# Altium PCB Breakout_v4.PcbDoc
Units mm, origin at the board's own origin, x right, y up, seen from the top; angles counter-clockwise.
Board outline 222 x 70 mm, 2 copper layers (Top Layer, Bottom Layer); 42 components, 39 nets, 139 pads, 4 vias.
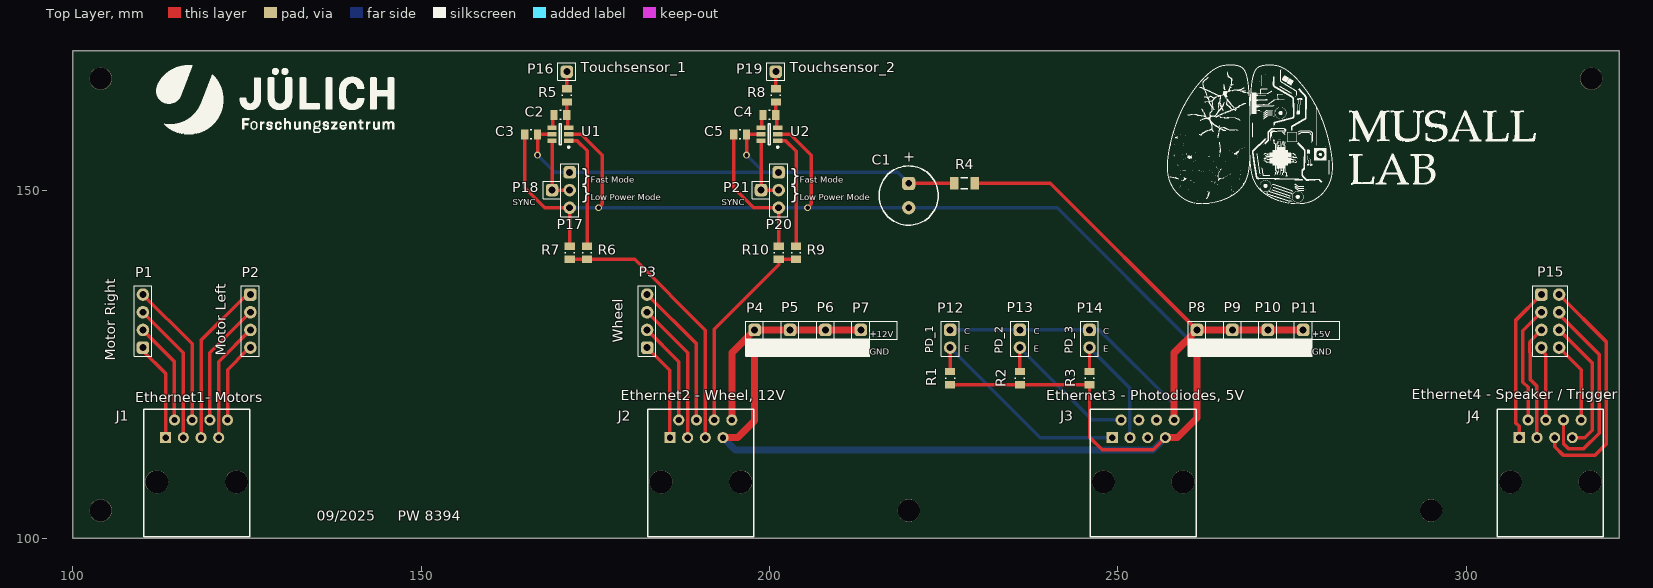
[diagram p0: Top Layer view]
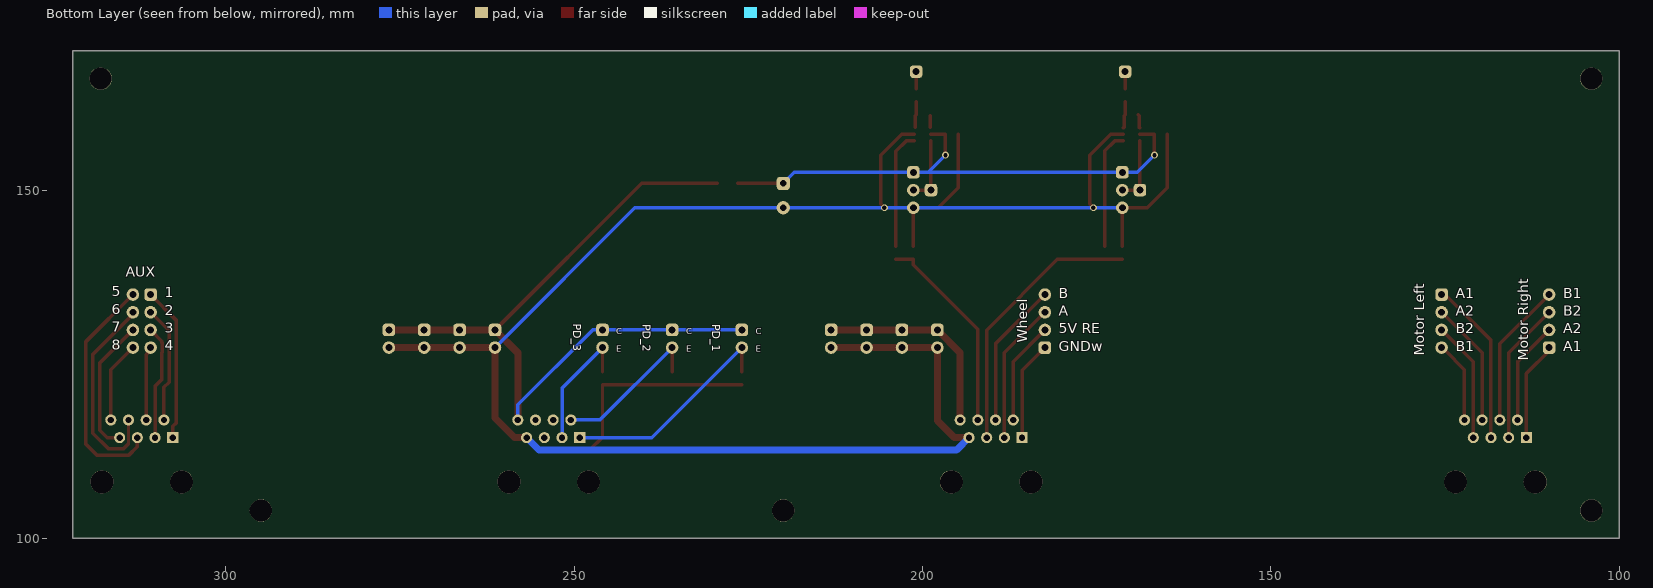
[diagram p1: Bottom Layer view, seen from below]
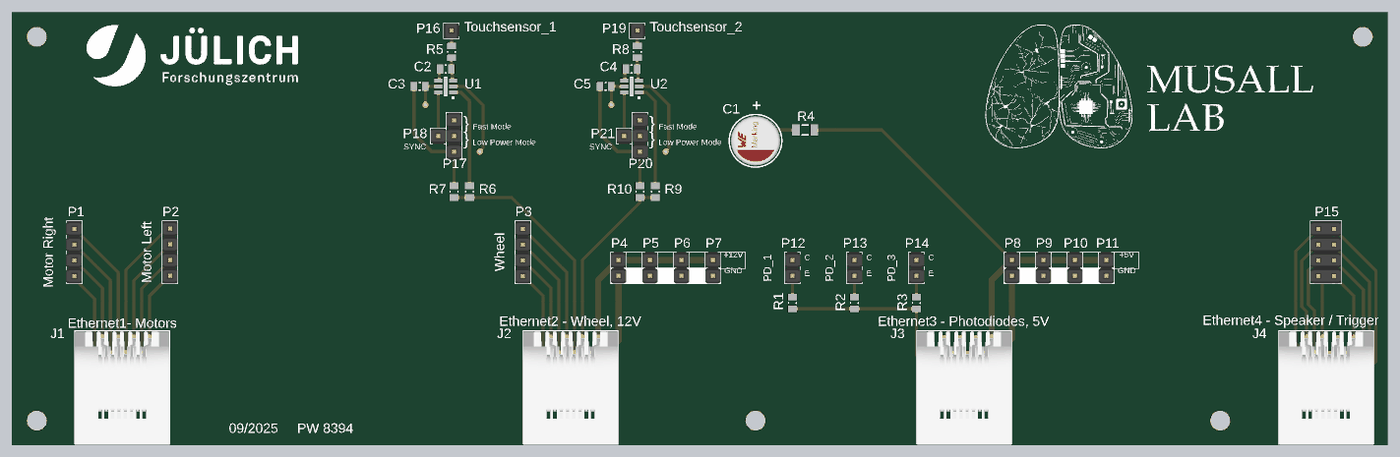
[diagram p2: 3D render of the assembled board from above, using the file's embedded part models]

## Layer stack, top to bottom
Top Solder: solder mask 0.0102, Solder Resist, Dk 3.5
Top Layer: signal copper 0.0356
Dielectric 1: dielectric 0.32, FR-4, Dk 4.8
Bottom Layer: signal copper 0.0356
Bottom Solder: solder mask 0.0102, Solder Resist, Dk 3.5

## Board outline
100,100 100,170 322,170 322,100

## Design rules (kind name [scope] priority, off if disabled: settings)
Clearance [All] p1: gap=0.2 ignorepadtopadclearanceinfootprint=FALSE
ComponentClearance [All] p1: gap=0.01 collisioncheckmode=3 verticalgap=0.01 showdistances=FALSE
DiffPairsRouting [All] p1: maxlimit=5 minlimit=0.3 mostfreqgap=0.5 toplayer_minwidth=0.2 toplayer_maxwidth=5 toplayer_prefwidth=0.5 bottomlayer_minwidth=0.2 bottomlayer_maxwidth=5 bottomlayer_prefwidth=0.5 maxuncoupledlength=12.7
HoleToHoleClearance [All] p1: gap=0.2 allowstackedmicrovias=TRUE
MinimumSolderMaskSliver [All] p1: minsoldermaskwidth=0.2
PolygonConnect [All] p1: connectstyle=Relief reliefconductorwidth=0.254 reliefentries=4 polygonreliefangle="90 Angle" airgapwidth=0.254
RoutingVias [All] p1: holewidth=0.711 width=1.27 viastyle="Through Hole" minholewidth=0.711 minwidth=1.27 maxholewidth=0.711 maxwidth=1.27
SilkToSilkClearance [All] p1: silktosilkclearance=0
SilkToSolderMaskClearance [IsPad] p1: minsilkscreentomaskgap=0 clearancetoexposedcopper=TRUE
SolderMaskExpansion [All] p1: expansion=0.102 istentingtop=FALSE
SupplyNets "Schematic Supply Nets_2" [InNet('+12')] p1: voltage=0.000
SupplyNets "Schematic Supply Nets_1" [InNet('GND')] p2: voltage=0.000
SupplyNets "Schematic Supply Nets" [InNet('+5V')] p3: voltage=0.000
Width [All] p1: maxlimit=5 minlimit=0.2 preferedwidth=0.5
24 further rules are at their usual default settings.

## Components (designator, comment, footprint, x,y, rotation, side; value= is the part's Value field where it differs from the comment)
C1 "870585774003" WCAP-HTAH_D8H11.5 220,149.21 r90 top locked value=47µF
C2 "10nF 0805 X7R 50V 5%" "Copy of 0805" 170,160.8 r0 top locked value=10nF
C3 "100nF 0805 X7R 100V" 0805 165.8,158 r180 top locked value=100nF
C4 "10nF 0805 X7R 50V 5%" "Copy of 0805" 200,160.8 r0 top locked value=10nF
C5 "100nF 0805 X7R 100V" 0805 195.8,158 r180 top locked value=100nF
J1 "5569118-1" 5569118-1-Footprint-1 112.065,108.11 r0 top locked
J2 "5569118-1" 5569118-1-Footprint-1 184.455,108.11 r0 top locked
J3 "5569118-1" 5569118-1-Footprint-1 247.955,108.11 r0 top locked
J4 "5569118-1" 5569118-1-Footprint-1 306.375,108.11 r0 top locked
P1 "SL_1_025_4_ G" "SL_1_025_4_ G" 110.065,127.38 r180 top locked
P2 "SL_1_025_4_ G" "SL_1_025_4_ G" 125.495,135 r0 top locked
P3 "SL_1_025_4_ G" "SL_1_025_4_ G" 182.455,127.38 r180 top locked
P4 "SL_1_025_2_ G" "SL_1_025_2_ G" 197.885,129.92 r0 top locked
P5 "SL_1_025_2_ G" "SL_1_025_2_ G" 202.965,129.92 r0 top locked
P6 "SL_1_025_2_ G" "SL_1_025_2_ G" 208.045,129.92 r0 top locked
P7 "SL_1_025_2_ G" "SL_1_025_2_ G" 213.125,129.92 r0 top locked
P8 "SL_1_025_2_ G" "SL_1_025_2_ G" 261.385,129.92 r0 top locked
P9 "SL_1_025_2_ G" "SL_1_025_2_ G" 266.465,129.92 r0 top locked
P10 "SL_1_025_2_ G" "SL_1_025_2_ G" 271.545,129.92 r0 top locked
P11 "SL_1_025_2_ G" "SL_1_025_2_ G" 276.625,129.92 r0 top locked
P12 "SL_1_025_2_ G" "SL_1_025_2_ G" 225.955,129.92 r0 top locked
P13 "SL_1_025_2_ G" "SL_1_025_2_ G" 235.955,129.92 r0 top locked
P14 "SL_1_025_2_ G" "SL_1_025_2_ G" 245.955,129.92 r0 top locked
P15 "SL 2 025 8 G" "SL 2 025 2 G-Footprint-1" 310.82,135 r0 top locked
P16 "SL_1_025_1_ G" "Copy of SL_1_025_2_ G" 170.925,167 r0 top locked
P17 "SL_1_025_3_ G" "Copy of SL_1_025_4_ G" 171.34,152.54 r0 top locked
P18 "SL_1_025_1_ G" "Copy of SL_1_025_2_ G" 168.8,150 r90 top locked
P19 "SL_1_025_1_ G" "Copy of SL_1_025_2_ G" 200.925,167 r0 top locked
P20 "SL_1_025_3_ G" "Copy of SL_1_025_4_ G" 201.34,152.54 r0 top locked
P21 "SL_1_025_1_ G" "Copy of SL_1_025_2_ G" 198.8,150 r90 top locked
R1 "10K 0805 200V 0,25W 0,5% 50ppm/K" "0805 (2012)" 225.955,123 r90 top locked value=10k
R2 "10K 0805 200V 0,25W 0,5% 50ppm/K" "0805 (2012)" 235.955,123 r90 top locked value=10k
R3 "10K 0805 200V 0,25W 0,5% 50ppm/K" "0805 (2012)" 245.955,123 r90 top locked value=10k
R4 "100R 1206 200V 0,25W 25ppm/K" "1206 (3216)" 228,150.96 r0 top locked value=100
R5 "10K 0805 200V 0,25W 0,5% 50ppm/K" "0805 (2012)" 170.925,163.6 r270 top locked value=10k
R6 "5K 0805 100V 0,2W" "0805 (2012)" 173.84,141 r90 top value=5k
R7 "10K 0805 200V 0,25W 0,5% 50ppm/K" "0805 (2012)" 171.34,141 r270 top value=10k
R8 "10K 0805 200V 0,25W 0,5% 50ppm/K" "0805 (2012)" 200.925,163.6 r270 top locked value=10k
R9 "5K 0805 100V 0,2W" "0805 (2012)" 203.84,141 r90 top value=5k
R10 "10K 0805 200V 0,25W 0,5% 50ppm/K" "0805 (2012)" 201.34,141 r270 top value=10k
U1 "AT42QT1010-TSHR" 6ST1_M 170,158 r180 top locked
U2 "AT42QT1010-TSHR" 6ST1_M 200,158 r180 top locked

## Footprints (in the part's own frame and the unit in brackets; to place one, negate y for a bottom-side part, rotate by r counter-clockwise, add the part's x,y. Pads: shape width x height; smd on the part's side, far side on the other; paste and mask are expansions set on the pad)
6ST1_M [mm] "SOT23, 6-Leads, Body 2.9x1.6mm, Pitch 0.95mm, Lead Span 2.8mm, IPC Low Density"
  rect 1.3x0.65 smd: 1(-1.2,0.95) 2(-1.2,0) 3(-1.2,-0.95) 4(1.2,-0.95) 5(1.2,0) 6(1.2,0.95)
  silkscreen extent -1.33,-1.5 0.15,1.97, body extent -0.87,-1.5 0.87,1.5, height 1.45
0805 [mm] "Chip Capacitor, 2-Leads, Body 2,00x1,25mm, IPC Medium Density"
  rect 1.05x1.45 smd: 1(-0.925,0) 2(0.925,0)
  silkscreen extent -0.1,-0.63 0.1,0.63, body extent -1.1,-0.72 1.1,0.72, height 1.25
"0805 (2012)" [mm] "Chip Capacitor, 2-Leads, Body 2,05x1,25mm, IPC Medium Density"
  rect 1.05x1.45 smd: 1(-0.95,0) 2(0.95,0)
  silkscreen extent -0.05,-0.63 0.05,0.63, body extent -1.1,-0.7 1.1,0.7, height 1
"1206 (3216)" [mm] "Chip Capacitor, 2-Leads, Body 3,25x1,60mm, IPC Medium Density"
  rect 1.2x1.8 smd: 1(-1.475,0) 2(1.475,0)
  silkscreen extent -0.5,-0.8 0.5,0.8, body extent -1.7,-0.87 1.7,0.87, height 1.45
5569118-1-Footprint-1 [mm]
  rect 1.6x1.6 hole 0.9: 1(1.27,6.35)
  round 1.6 hole 0.9: 2(2.54,8.89) 3(3.81,6.35) 4(5.08,8.89) 5(6.35,6.35) 6(7.62,8.89) 7(8.89,6.35) 8(10.16,8.89)
  round 3.3 hole 3.3: X(0,0) Y(11.43,0)
  silkscreen extent -1.91,-7.87 13.33,10.42, body extent -1.91,-8 13.33,10.26, height 12.6
"Copy of 0805" [mm] "Chip Capacitor, 2-Leads, Body 2,00x1,25mm, IPC Medium Density"
  rect 1.05x1.45 smd: 1(-0.925,0) 2(0.925,0)
  silkscreen extent -0.1,-0.63 0.1,0.63, body extent -1.1,-0.72 1.1,0.72, height 1.25
"Copy of SL_1_025_2_ G" [mm]
  rrect50% 1.8x1.8 hole 1: 1(0,0)
  silkscreen extent -1.27,-1.27 1.27,1.27, body extent -1.27,-1.25 1.27,1.25, height 9.8
"Copy of SL_1_025_4_ G" [mm]
  rrect50% 1.8x1.8 hole 1: 1(0,0)
  round 1.8 hole 1: 2(0,-2.54) 3(0,-5.08)
  silkscreen extent -1.27,-6.35 1.27,1.27, body extent -1.25,-6.35 1.25,1.27, height 9.8
"SL 2 025 2 G-Footprint-1" [mm]
  rrect50% 1.8x1.8 hole 1: 1(0,0)
  round 1.8 hole 1: 2(2.54,0) 3(0,-2.54) 4(2.54,-2.54) 5(0,-5.08) 6(2.54,-5.08) 7(0,-7.62) 8(2.54,-7.62)
  silkscreen extent -1.27,-8.89 3.81,1.27, body extent -1.23,-8.89 3.77,1.27, height 8.2
"SL_1_025_2_ G" [mm]
  rrect50% 1.8x1.8 hole 1: 1(0,0)
  round 1.8 hole 1: 2(0,-2.54)
  silkscreen extent -1.27,-3.81 1.27,1.27, body extent -1.25,-3.81 1.25,1.27, height 9.8
"SL_1_025_4_ G" [mm]
  rrect50% 1.8x1.8 hole 1: 1(0,0)
  round 1.8 hole 1: 2(0,-2.54) 3(0,-5.08) 4(0,-7.62)
  silkscreen extent -1.27,-8.89 1.27,1.27, body extent -1.25,-8.89 1.25,1.27, height 9.8
WCAP-HTAH_D8H11.5 [mm] "Aluminum Hybrid Polymer Capacitor. body diameter 8mm"
  rrect50% 1.9x1.9 hole 0.9: 1(1.75,0)
  round 1.9 hole 0.9: 2(-1.75,0)
  silkscreen extent -4.25,-4.25 4.25,4.25, body extent -4,-4 4,4, height 11.59

## Part data
C1: library part CMP-001-00097-1, "Cap, 47Uf, 50V, Alu Elec, Hybrid, Rad Rohs Compliant: Yes", Capacitor Type="Aluminum Hybrid", Manufacturer="Würth Elektronik", Max Operating Temperature=125°C, Min Operating Temperature=-55°C, Tolerance=20%, Voltage Rating=50V, ESR=0,03Ohm, Mounting Technology=THT, Pins=2, RoHS Compliant=Yes, user=IBI-TAE
C2 C4: library part CMP-001-00096-1, "Kondensator 10nF 0805 X7R 50V 5%", Capacitor Type=Ceramic, Case/Package=0805, Max Operating Temperature=150°C, Min Operating Temperature=-55°C, Mounting Technology="Surface Mount", Pins=2, RoHS Compliant=Yes, user=IBI-TAE
C3 C5: library part CMP-001-00095-1, "Kondensator 100nF 0805 X7R 100V 5%", Capacitor Type=Ceramic, Case/Package=0805, Max Operating Temperature=125°C, Min Operating Temperature=-55°C, Tolerance=5%, Voltage Rating=100V, Mounting Technology="Surface Mount", Pins=2, RoHS Compliant=Yes, user=IBI-TAE
J1 J2 J3 J4: library part CMP-002-00096-6, "Telecom and Datacom Connector, 8 Contact(s), Female, Right Angle, Solder Terminal, Locking, Jack", Case/Package=RJ45, Max Operating Temperature=85°C, Min Operating Temperature=-40°C, Connector Type="TELECOM AND DATACOM CONNECTOR", Mounting Technology=Panel,Board, Pins=8, RoHS Compliant=Yes, user=IBI-TAE
P1 P2 P3: library part CMP-002-00109-2, "Fischer SL_1_025_4_ G, Stiftleiste, 1 Reiheb, 4 Pole, vergoldet", Max Current Rating=3A, Voltage Rating=300V, Connector Type="BOARD CONNECTOR", Contact Finish - Mating=GOLD, Contact Finish - Termination=GOLD, Contact Gender=Male, Gender=male, Mounting Style=STRAIGHT, Mounting Technology=Board, Number of Contacts=4, Number of Rows Loaded=1, Pins=4, RoHS Compliant=Yes, Terminal Pitch=2.54mm, user=IBI-TAE
P4 P5 P6 P7 P8 P9 P10 P11 P12 P13 P14: library part CMP-002-00108-2, "Fischer SL_1_025_2_ G, Stiftleiste, 1 Reiheb, 2 Pole, vergoldet", Max Current Rating=3A, Voltage Rating=300V, Connector Type="BOARD CONNECTOR", Contact Finish - Mating=GOLD, Contact Finish - Termination=GOLD, Contact Gender=Male, Gender=male, Mounting Style=STRAIGHT, Mounting Technology=Board, Number of Contacts=2, Number of Rows Loaded=1, Pins=2, RoHS Compliant=Yes, Terminal Pitch=2.54mm, user=IBI-TAE
P15: library part CMP-002-00101-2, "Fischer  SL 2 025 8 G, Stiftleiste, 2 Reiheb, 8 Pole, vergoldet", Max Current Rating=3A, Voltage Rating=300V, Connector Type="BOARD CONNECTOR", Contact Finish - Mating=GOLD, Contact Finish - Termination=GOLD, Contact Gender=Male, Gender=male, Mounting Style=STRAIGHT, Mounting Technology=Board, Number of Contacts=8, Number of Rows Loaded=2, Pins=6, RoHS Compliant=Yes, Terminal Pitch=2.54mm, user=IBI-TAE
P16 P18 P19 P21: library part CMP-002-00110-1, "Fischer SL_1_025_1_ G, Stiftleiste, 1 Reiheb, 1 Pole, vergoldet", Max Current Rating=3A, Voltage Rating=300V, Connector Type="BOARD CONNECTOR", Contact Finish - Mating=GOLD, Contact Finish - Termination=GOLD, Contact Gender=Male, Gender=male, Mounting Style=STRAIGHT, Mounting Technology=Board, Number of Contacts=1, Number of Rows Loaded=1, Pins=1, RoHS Compliant=Yes, Terminal Pitch=2.54mm, user=IBI-TAE
P17 P20: library part CMP-002-00111-1, "Fischer SL_1_025_3_ G, Stiftleiste, 1 Reiheb, 3 Pole, vergoldet", Max Current Rating=3A, Voltage Rating=300V, Connector Type="BOARD CONNECTOR", Contact Finish - Mating=GOLD, Contact Finish - Termination=GOLD, Contact Gender=Male, Gender=male, Mounting Style=STRAIGHT, Mounting Technology=Board, Number of Contacts=3, Number of Rows Loaded=1, Pins=3, RoHS Compliant=Yes, Terminal Pitch=2.54mm, user=IBI-TAE
R1 R2 R3 R5 R7 R8 R10: library part CMP-009-00206-1, "Widerstand 10K 0805 200V 0,25W 0,5% 50ppm/K", Case/Package=0805, Max Operating Temperature=155°C, Min Operating Temperature=-55°C, Power=250mW, Temperaturkoeffizient="50 ppm/K", Tolerance=0.5%, Voltage Rating=200V, Mounting Technology="Surface Mount", Pins=2, RoHS Compliant=Yes, user=IBI-TAE
R4: library part CMP-009-00204-1, "Widerstans SMD 100R 1206 200V 0,25W 25ppm/K", Case/Package=1206, Max Operating Temperature=155°C, Min Operating Temperature=-55°C, Power=250mW, Tolerance=1%, Voltage Rating=200V, Mounting Technology=SMD, Pins=2, user=IBI-TAE
R6 R9: library part CMP-009-00208-1, "Widerstand 5K 0805 100V 0,2W 25ppm/K", Case/Package=0805, Max Operating Temperature=150°C, Min Operating Temperature=-55°C, Power=200mW, Tolerance=0.1%, Voltage Rating=100V, Mounting Technology="Surface Mount", Pins=2, RoHS Compliant=yes, user=IBI-TAE
U1 U2: library part CMP-031-00017-3, "Analog Circuit, 1 Func, PDSO6 ; Touchsensor; digital burst mode charge-transfer sensor ;", Case/Package=LSSOP, Max Operating Temperature=85°C, Max Supply Voltage=5.5V, Min Operating Temperature=-40°C, Min Supply Voltage=1.8V, Nominal Supply Voltage=3V, Package Body Material=Plastic, Package Shape=Rectangular, Package Style="SMALL OUTLINE, LOW PROFILE, SHRINK PITCHMeter", Peak Reflow Temperature (Cel)=260°C, Temperature Grade=INDUSTRIAL, Time @ Peak Reflow Temperature-Max (s)=40s, Channels=1, Height - Seated (Max)=1.45mm, JESD-30 Code=R-PDSO-G6, JESD-609 Code=e4, Length=2.9mm, Moisture Sensitivity Level=1, Pins=6, Qualification Status="Not Qualified", Reach SVHC Compliant=Yes, RoHS Compliant=Yes, Surface Mount=Yes, Terminal Finish=Nickel, Terminal Form="Gull Wing", Terminal Pitch=0.95mm, Terminal Position=DUAL, Throw Configuration="ANALOG CIRCUIT", user=IBI-TAE, Width=1.6mm

## Free pads (board coordinates)
  round 3.2 hole 3.2: X(104,104) X(104,166) X(220,104) X(295,104) X(318,166)

## Via types
v1: diameter 1, hole 0.6, Top Layer to Bottom Layer, 4 vias

## Nets (pads, with @x,y where several pads share a name; then routed paths per layer and width w, separated by ;. In a path a pad name is that pad's centre, name@x,y a point inside that pad or via, vN(x,y) a via of type N, cw(c..) or ccw(c..) an arc to the next point about the centre after c; other vN are vias at no path point)
+5V: J3.8 P8.1 P9.1 P10.1 P11.1 P12.1 P13.1 P14.1 R4.2 | length 108.9
  Top Layer w0.5: R4.2 240.345,150.96 P8.1
  Top Layer w1: J3.8 258.115,126.65 P8.1 P9.1 P10.1 P11.1
  Bottom Layer w0.5: P12.1 P13.1 P14.1 247.38,129.92 258.115,119.185 J3.8
+12: J2.8 P4.1 P5.1 P6.1 P7.1 | length 29.5
  Top Layer w1: J2.8 194.615,126.65 P4.1 P5.1 P6.1 P7.1
GND: C1.2 C3.2 C5.2 J2.7 J3.7 P4.2 P5.2 P6.2 P7.2 P8.2 P9.2 P10.2 P11.2 P17.3 P20.3 R1.1 R2.1 R3.1 R7.1 R10.1 U1.2 U2.2 | length 334.7
  Top Layer w0.5: C3.2 164.875,150.325 167.74,147.46 P17.3 R7.1 ; U1.2 173,158 176,155 176,148.003 175.5,147.503 v1(175.5,147.46) ; C5.2 194.875,150.325 197.74,147.46 P20.3 R10.1 ; U2.2 203,158 206,155 206,148.003 v1@205.5,147.503 ; R1.1 R2.1 R3.1 245.955,114.545 247.8,112.7 255.085,112.7 J3.7
  Top Layer w1: J2.7 195.46,114.46 197.885,116.885 P4.2 P5.2 P6.2 P7.2 ; J3.7 258.56,114.46 261.385,117.285 P8.2 P9.2 P10.2 P11.2
  Bottom Layer w0.5: P17.3 v1(175.5,147.46) P20.3 v1(205.5,147.46) C1.2 241.305,147.46 P8.2
  Bottom Layer w1: J2.7 195.105,112.7 255.085,112.7 J3.7
NetC1_1: C1.1 C3.1 C5.1 P17.1 P20.1 R4.1 U1.5 U2.5 | length 75.1
  Top Layer w0.5: v1(166.725,155) C3.1 U1.5 ; v1(196.725,155) C5.1 U2.5 ; C1.1 R4.1
  Bottom Layer w0.5: v1(166.725,155) 169.185,152.54 P17.1 199.185,152.54 ; v1(196.725,155) 199.185,152.54 ; C1.1 218.42,152.54 P20.1 199.185,152.54
NetC2_1: C2.1 U1.4 | length 2
  Top Layer w0.5: U1.4 168.862,158.95 168.938,159.025 168.938,160.663 C2.1
NetC2_2: C2.2 R5.2 U1.3 | length 3.9
  Top Layer w0.5: R5.2 C2.2 171.063,160.663 171.063,159.025 171.138,158.95 U1.3
NetC4_1: C4.1 U2.4 | length 1.6
  Top Layer w0.5: U2.4@198.938,159.025 C4.1@198.938,160.663
NetC4_2: C4.2 R8.2 U2.3 | length 3.5
  Top Layer w0.5: C4.2 R8.2 ; U2.3@201.063,159.025 C4.2@201.063,160.663
NetJ1_1: J1.1 P1.1 | length 13.9
  Top Layer w0.5: P1.1@110,127 113.335,123.665 J1.1
NetJ1_2: J1.2 P1.2 | length 14.8
  Top Layer w0.5: P1.2 114.605,125.38 J1.2
NetJ1_3: J1.3 P1.3 | length 20.4
  Top Layer w0.5: P1.3 115.875,126.65 J1.3
NetJ1_4: J1.4 P1.4 | length 20.9
  Top Layer w0.5: P1.4 117.145,127.92 J1.4
NetJ1_5: J1.5 P2.1 | length 23.3
  Top Layer w0.5: J1.5 118.415,128.415 P2.1@125,135
NetJ1_6: J1.6 P2.2 | length 17.9
  Top Layer w0.5: J1.6 119.685,126.65 P2.2
NetJ1_7: J1.7 P2.3 | length 17.3
  Top Layer w0.5: J1.7 120.955,125.38 P2.3
NetJ1_8: J1.8 P2.4 | length 11.1
  Top Layer w0.5: J1.8 122.225,124.225 P2.4@125,127
NetJ2_1: J2.1 P3.1 | length 14.3
  Top Layer w0.5: P3.1 185.725,124.11 J2.1
NetJ2_2: J2.2 P3.2 | length 14.8
  Top Layer w0.5: P3.2 186.995,125.38 J2.2
NetJ2_3: J2.3 P3.3 | length 20.4
  Top Layer w0.5: P3.3 188.265,126.65 J2.3
NetJ2_4: J2.4 P3.4 | length 20.9
  Top Layer w0.5: P3.4 189.535,127.92 J2.4
NetJ2_5: J2.5 R6.1 R7.2 | length 39.1
  Top Layer w0.5: R7.2 R6.1 180.65,140.05 190.805,129.895 J2.5
NetJ2_6: J2.6 R9.1 R10.2 | length 29.4
  Top Layer w0.5: J2.6 192.075,130.004 201.34,139.269 R10.2 R9.1
NetJ3_1: J3.1 P12.2 R1.2 | length 32.1
  Top Layer w0.5: R1.2 P12.2
  Bottom Layer w0.5: P12.2 238.875,114.46 J3.1
NetJ3_2: J3.2 P13.2 R2.2 | length 22.3
  Top Layer w0.5: R2.2 P13.2
  Bottom Layer w0.5: P13.2 246.335,117 J3.2
NetJ3_3: J3.3 P14.2 R3.2 | length 18.8
  Top Layer w0.5: R3.2 P14.2
  Bottom Layer w0.5: P14.2 251.765,121.57 J3.3
NetJ4_1: J4.1 P15.1 | length 22.2
  Top Layer w0.5: J4.1 307.645,116.078 307.17,116.553 307.17,131.35 P15.1
NetJ4_2: J4.2 P15.3 | length 16.9
  Top Layer w0.5: J4.2 308.915,121.671 308.17,122.416 308.17,129.81 P15.3
NetJ4_3: J4.3 P15.5 | length 16.6
  Top Layer w0.5: J4.3 310.185,121.815 309.2,122.8 309.2,126.667 309.17,126.697 309.17,128.063 309.2,128.093 309.2,128.3 P15.5
NetJ4_4: J4.4 P15.7 | length 10.6
  Top Layer w0.5: P15.7 310.82,127.028 311.455,126.393 J4.4
NetJ4_5: J4.5 P15.2 | length 34.1
  Top Layer w0.5: J4.5 312.725,113.175 314,111.9 318.5,111.9 320.1,113.5 320.1,128.26 P15.2
NetJ4_6: J4.6 P15.4 | length 29.4
  Top Layer w0.5: P15.4 313.36,132.14 319.1,126.4 319.1,115.086 316.914,112.9 314.7,112.9 313.995,113.605 J4.6
NetJ4_7: J4.7 P15.6 | length 19.6
  Top Layer w0.5: P15.6 318.1,125.18 318.1,115.5 317.06,114.46 J4.7
NetJ4_8: J4.8 P15.8 | length 11.7
  Top Layer w0.5: P15.8 316.535,124.205 J4.8
NetP16_1: P16.1 R5.1 | length 2.4
  Top Layer w0.5: R5.1 P16.1
NetP17_2: P17.2 P18.1 U1.6 | length 9.6
  Top Layer w0.5: U1.6 P18.1 P17.2
NetP19_1: P19.1 R8.1 | length 2.4
  Top Layer w0.5: R8.1 P19.1
NetP20_2: P20.2 P21.1 U2.6 | length 9.6
  Top Layer w0.5: U2.6 P21.1 P20.2
NetR6_2: R6.2 U1.1 | length 16.9
  Top Layer w0.5: U1.1 172.425,157.05 173.84,155.635 R6.2
NetR9_2: R9.2 U2.1 | length 16.9
  Top Layer w0.5: U2.1 202.35,157.05 203.84,155.56 R9.2
pads on no net: J1.X J1.Y J2.X J2.Y J3.4 J3.5 J3.6 J3.X J3.Y J4.X J4.Y

## Silkscreen, mask and mechanical layers (free items; w line width, h text height)
Top Overlay:
  drawing of 255 lines, arcs and shapes, not listed
  text "Touchsensor_1" at 172.925,166.419 h2.5
  text "Touchsensor_2" at 202.925,166.419 h2.5
  text "Fast Mode" at 174.34,150.797 h1.5
  text "Fast Mode" at 204.34,150.797 h1.5
  text "}" at 172.84,150.506 h3.3
  text "}" at 202.84,150.506 h3.3
  text "Low Power Mode" at 174.34,148.257 h1.5
  text "Low Power Mode" at 204.34,148.257 h1.5
  text "}" at 172.84,147.966 h3.3
  text "}" at 202.84,147.966 h3.3
  text "SYNC" at 163.184,147.519 h1.5
  text "SYNC" at 193.184,147.519 h1.5
  text "C" at 227.955,129.033 h1.5
  text "C" at 237.955,129.033 h1.5
  text "C" at 247.955,129.033 h1.5
  text "+12V" at 214.425,128.595 h1.5
  text "+5V" at 277.925,128.595 h1.5
  text "Wheel" at 179.429,128.113 h2.5 r90
  text "PD_1" at 223.955,126.595 h2 r90
  text "PD_2" at 233.955,126.53 h2 r90
  text "PD_3" at 243.955,126.523 h2 r90
  text "E" at 227.955,126.493 h1.5
  text "E" at 237.955,126.493 h1.5
  text "E" at 247.955,126.493 h1.5
  text "Motor Left" at 122.469,126.248 h2.5 r90
  text "GND" at 214.425,126.055 h1.5
  text "GND" at 277.925,126.055 h1.5
  text "Motor Right" at 106.595,125.503 h2.5 r90
  text "Ethernet4 - Speaker / Trigger" at 292.186,119.47 h2.5
  text "Ethernet2 - Wheel, 12V" at 178.646,119.317 h2.5
  text "Ethernet3 - Photodiodes, 5V" at 239.719,119.317 h2.5
  text "Ethernet1- Motors" at 108.962,119.026 h2.5
  text "09/2025     PW 8394" at 135,102.028 h2.5
Bottom Overlay:
  text "AUX" at 314.383,137.026 h2.5
  text "5" at 316.42,134.223 h2.5
  text "1" at 308.82,134.097 h2.5
  text "B1" at 108.065,134 h2.5
  text "A1" at 123.495,134 h2.5
  text "B" at 180.455,134.003 h2.5
  text "6" at 316.418,131.67 h2.5
  text "2" at 308.822,131.557 h2.5
  text "B2" at 108.065,131.46 h2.5
  text "A2" at 123.495,131.46 h2.5
  text "A" at 180.455,131.463 h2.5
  text "PD_3" at 250.605,130.777 h2 r90
  text "PD_2" at 240.605,130.77 h2 r90
  text "PD_1" at 230.605,130.705 h2 r90
  text "7" at 316.396,129.13 h2.5
  text "C" at 223.955,129.033 h1.5
  text "C" at 233.955,129.033 h1.5
  text "C" at 243.955,129.033 h1.5
  text "3" at 308.82,129.031 h2.5
  text "A2" at 108.065,128.92 h2.5
  text "B2" at 123.495,128.92 h2.5
  text "5V RE" at 180.455,128.936 h2.5
  text "Wheel" at 184.481,128.103 h2.5 r270
  text "8" at 316.415,126.59 h2.5
  text "E" at 223.955,126.493 h1.5
  text "E" at 233.955,126.493 h1.5
  text "E" at 243.955,126.493 h1.5
  text "4" at 308.82,126.479 h2.5
  text "A1" at 108.065,126.38 h2.5
  text "B1" at 123.495,126.38 h2.5
  text "GNDw" at 180.455,126.382 h2.5
  text "Motor Left" at 127.521,126.238 h2.5 r270
  text "Motor Right" at 112.535,125.493 h2.5 r270
Mechanical 1:
  the board outline again, w0.1
Mechanical 15:
  text "10k" at 172.25,162.81 h2.5
  text "10k" at 202.25,162.81 h2.5
  text "10nF" at 172.2,159.935 h2.5
  text "10nF" at 202.2,159.935 h2.5
  text "100nF" at 158.104,155.335 h2.5
  text "100nF" at 188.104,155.335 h2.5
  text "AT42QT1010" at 172.35,155.247 h2.5
  text "AT42QT1010" at 202.35,155.247 h2.5
  text "100R" at 229.775,152.46 h2.5
  text "47µF" at 217.6,142.971 h2.5
  text "10k" at 166.985,138.385 h2.5
  text "5k" at 175.365,138.387 h2.5
  text "10k" at 196.035,138.385 h2.5
  text "5k" at 205.39,138.387 h2.5
  text "MTJ-881X1" at 112.258,101.51 h2.5
  text "MTJ-881X1" at 184.648,101.51 h2.5
  text "MTJ-881X1" at 248.148,101.51 h2.5
  text "MTJ-881X1" at 306.568,101.51 h2.5

## Text inside footprints (layer, text, board x,y; h text height)
C1: Top Overlay "+" at 220.75,153.86 h1.5 r90